# EAGLE board Routage_Schema (EAGLE 9.6.2)
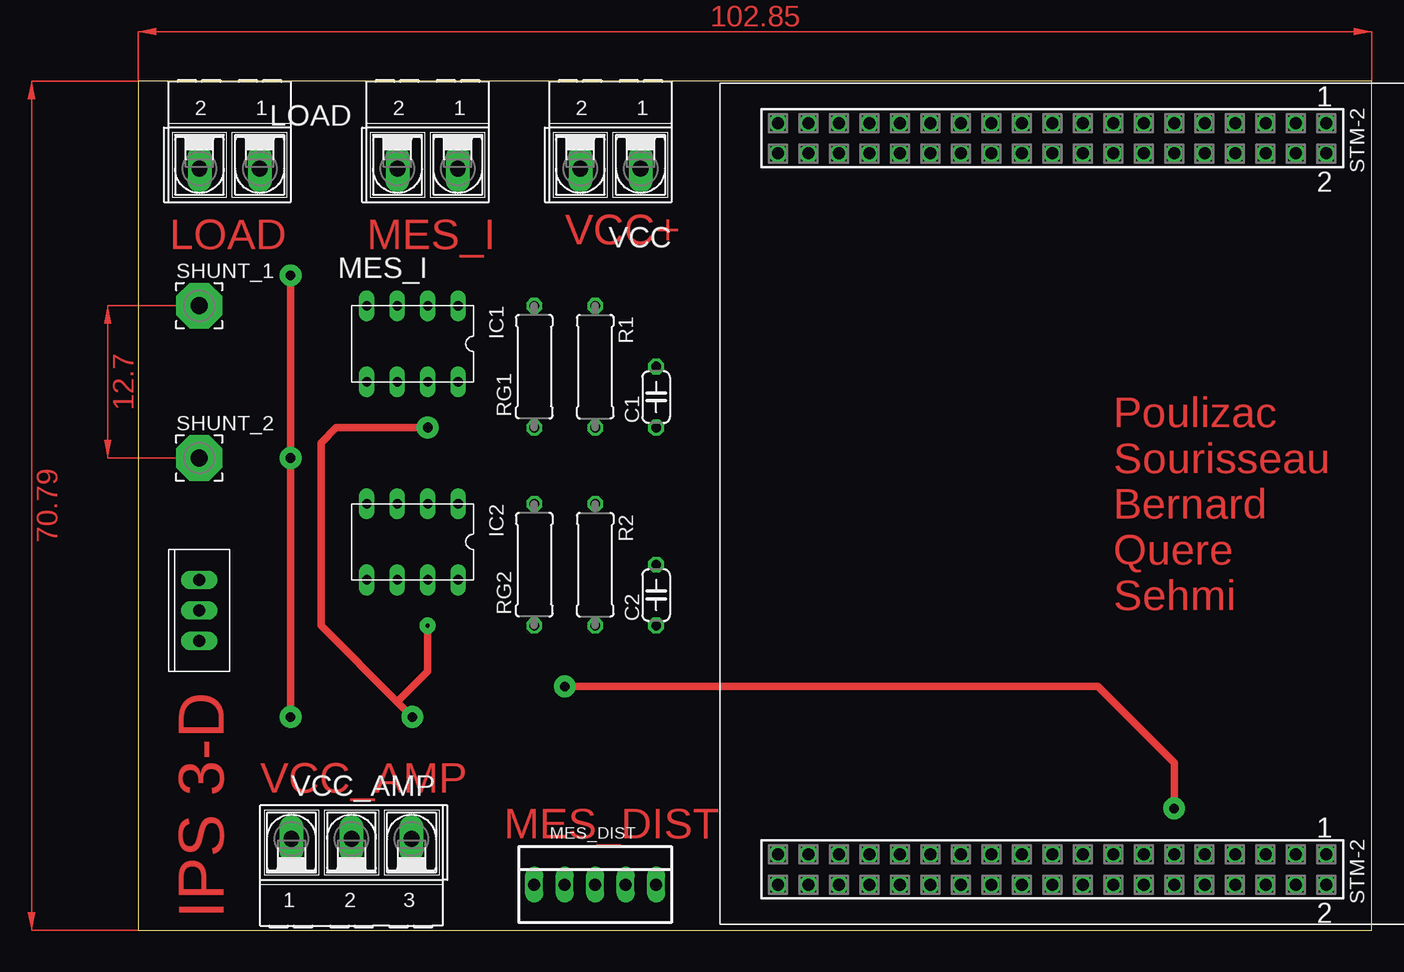
[diagram p0: board, top side]
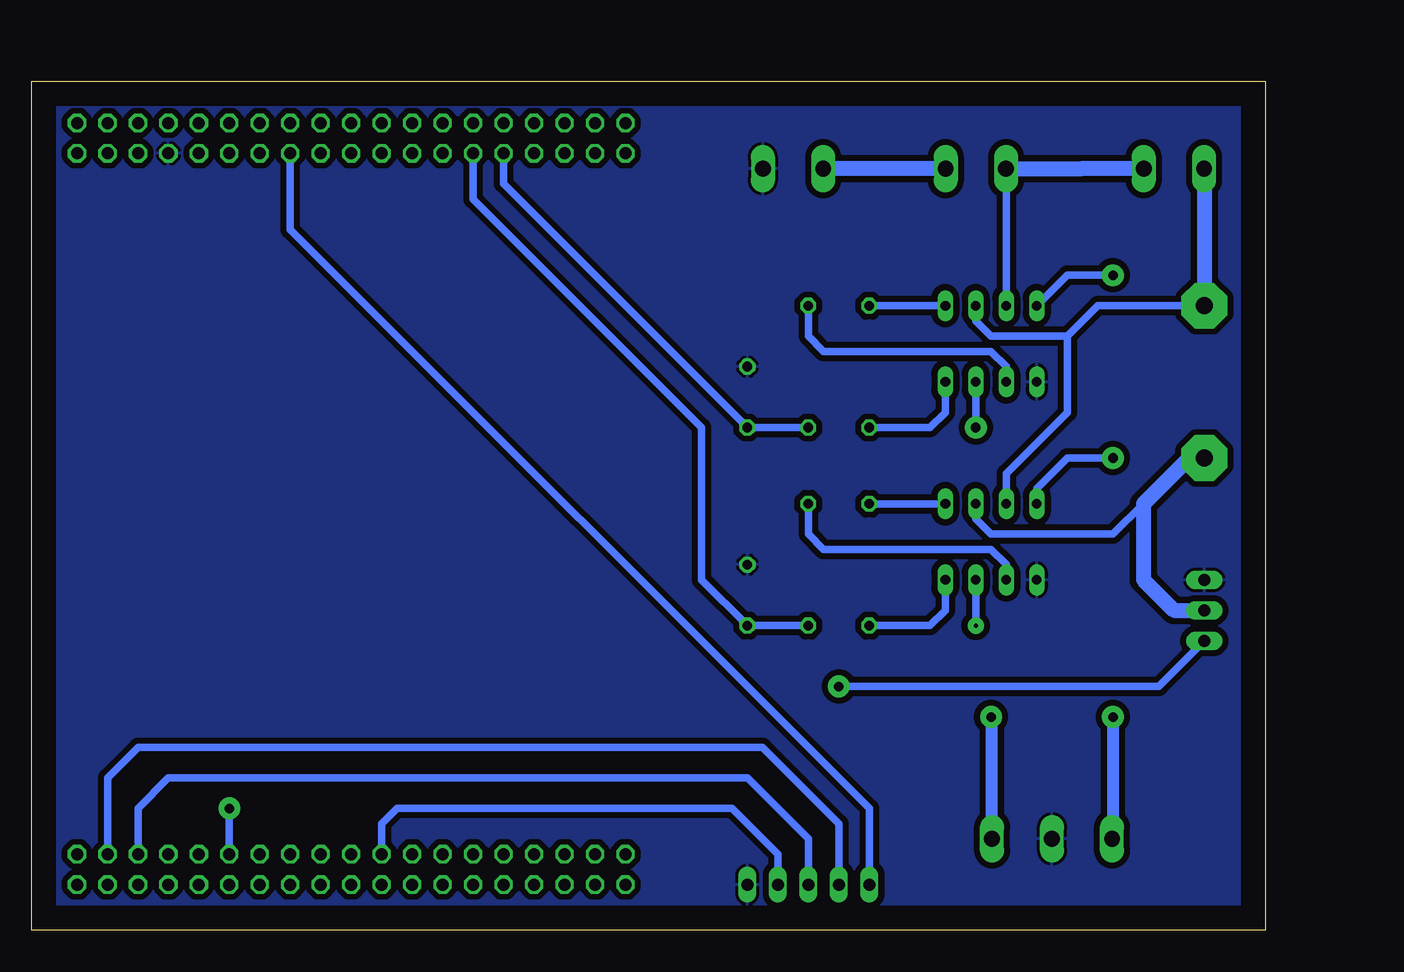
[diagram p1: board, bottom side, seen from below]

Size 102.85 x 70.79 mm. Coordinates in mm from the lower left corner, seen from the top.
Outline: 0,0 102.85,0 102.85,70.79 0,70.79 0,0
Copper layers (1*16): Top 0.035mm / dielectric 1.5mm / Bottom 0.035mm
Design rules "LBMS_ENIB": minimum track width 24mil, minimum drill 10mil, track to track 20mil, track to pad 20mil, pad to pad 20mil, via to via 20mil, smd to smd 8mil, copper to edge 80mil, drill to drill 8mil, minimum pad ring 10mil, minimum via ring 20mil, stop-mask expansion 4mil, vias tented up to drill 0mil, thermal gap 10mil

## Footprints (pad centres in the part's own frame; a part is rotated, then mirrored left to right if it is on the bottom)
C050-024X044 = drill 0.813 octagon: 1 -2.54,0; 2 2.54,0
DIL8 = drill 0.8 long: P1 -3.81,2.54; P2 -1.27,2.54; P3 1.27,2.54; P4 3.81,2.54; P5 3.81,8.89; P6 1.27,8.89; P7 -1.27,8.89; P8 -3.81,8.89
AK500/2-H = drill 1.321 long: 1 -2.515,0; 2 2.515,0
22-23-2051 = drill 1 long: 1 -5.08,0; 2 -2.54,0; 3 0,0; 4 2.54,0; 5 5.08,0
0309/10 = drill 0.813 octagon: 1 -5.08,0; 2 5.08,0
3,81/1,4 = drill 1.397 pad 3.81 octagon: 1 0,0
CONN_STM32_NUCLEO = drill 1 pad 1.5 octagon: 1 -1.27,22.86; 2 1.27,22.86; 3 -1.27,20.32; 4 1.27,20.32; 5 -1.27,17.78; 6 1.27,17.78; 7 -1.27,15.24; 8 1.27,15.24; 9 -1.27,12.7; 10 1.27,12.7; 11 -1.27,10.16; 12 1.27,10.16; 13 -1.27,7.62; 14 1.27,7.62; 15 -1.27,5.08; 16 1.27,5.08; 17 -1.27,2.54; 18 1.27,2.54; 19 -1.27,0; 20 1.27,0; 21 -1.27,-2.54; 22 1.27,-2.54; 23 -1.27,-5.08; 24 1.27,-5.08; 25 -1.27,-7.62; 26 1.27,-7.62; 27 -1.27,-10.16; 28 1.27,-10.16; 29 -1.27,-12.7; 30 1.27,-12.7; 31 -1.27,-15.24; 32 1.27,-15.24; 33 -1.27,-17.78; 34 1.27,-17.78; 35 -1.27,-20.32; 36 1.27,-20.32; 37 -1.27,-22.86; 38 1.27,-22.86; 39 59.69,22.86; 40 62.23,22.86; 41 59.69,20.32; 42 62.23,20.32; 43 59.69,17.78; 44 62.23,17.78; 45 59.69,15.24; 46 62.23,15.24; 47 59.69,12.7; 48 62.23,12.7; 49 59.69,10.16; 50 62.23,10.16; 51 59.69,7.62; 52 62.23,7.62; 53 59.69,5.08; 54 62.23,5.08; 55 59.69,2.54; 56 62.23,2.54; 57 59.69,0; 58 62.23,0; 59 59.69,-2.54; 60 62.23,-2.54; 61 59.69,-5.08; 62 62.23,-5.08; 63 59.69,-7.62; 64 62.23,-7.62; 65 59.69,-10.16; 66 62.23,-10.16; 67 59.69,-12.7; 68 62.23,-12.7; 69 59.69,-15.24; 70 62.23,-15.24; 71 59.69,-17.78; 72 62.23,-17.78; 73 59.69,-20.32; 74 62.23,-20.32; 75 59.69,-22.86; 76 62.23,-22.86
TO-220(2) = drill 1.016 long: GND 0,0; IN -2.54,0; OUT 2.54,0
AK500/3-H = drill 1.321 long: 1 -5.004,0; 2 0,0; 3 5.004,0

## Placement (x,y rotation side)
C1  [C050-024X044]  43.18,44.45 90 top
C2  [C050-024X044]  43.18,27.94 90 top
IC1  AD620  [DIL8]  22.86,54.61 180 top
IC2  AD620  [DIL8]  22.86,38.1 180 top
LOAD  [AK500/2-H]  7.62,63.5 180 top
MES_DIST  22-23-2051  [22-23-2051]  38.1,3.81 0 top
MES_I  [AK500/2-H]  24.13,63.5 180 top
R1  [0309/10]  38.1,46.99 270 top
R2  [0309/10]  38.1,30.48 270 top
RG1  [0309/10]  33.02,46.99 90 top
RG2  [0309/10]  33.02,30.48 90 top
SHUNT_1  [3,81/1,4]  5.08,52.07 0 top
SHUNT_2  [3,81/1,4]  5.08,39.37 0 top
STM-2  NUCLEO-F411RE  [CONN_STM32_NUCLEO]  76.2,66.04 270 top
U$1  IRLZ34N  [TO-220(2)]  5.08,26.67 90 top
VCC  [AK500/2-H]  39.37,63.5 180 top
VCC_AMP  [AK500/3-H]  17.78,7.62 0 top

## Library data of the parts
C1 C2 = rcl; SPICEPREFIX: C
IC1 IC2 = ad620
LOAD MES_I VCC VCC_AMP = con-ptr500; OC_FARNELL: unknown; OC_NEWARK: unknown
MES_DIST = con-molex; MF: MOLEX; MPN: 22-23-2051; OC_FARNELL: 1462952; OC_NEWARK: 38C9178
R1 R2 RG1 RG2 = rcl; SPICEPREFIX: R
SHUNT_1 SHUNT_2 = wirepad
STM-2 = prj-ips-jmb
U$1 = IRLZ34N; AVAILABILITY: In Stock; DESCRIPTION: N-Channel 55 V 30A (Tc) 3.8W (Ta), 68W (Tc) Surface Mount D2PAK; MF: Infineon Technologies; MP: IRLZ34N; PACKAGE: TO-220 Infineon; PRICE: None; PURCHASE-URL: https://pricing.snapeda.com/search/part/IRLZ34N/?ref=eda

## Nets
3.3: MES_DIST.1 STM-2.16
A: IC1.P3 LOAD.1 MES_I.2
GND: C1.2 C2.2 IC1.P5 IC2.P5 MES_DIST.5 STM-2.8 U$1.OUT VCC.1 VCC_AMP.2
N$1: IC2.P8 RG2.1
N$2: IC2.P1 RG2.2
N$3: IC1.P8 RG1.1
N$4: IC1.P1 RG1.2
PWM: STM-2.49 U$1.IN
RESET: MES_DIST.4 STM-2.59
SCL: MES_DIST.2 STM-2.41
SDA: MES_DIST.3 STM-2.43
V+: MES_I.1 VCC.2
V-_LOAD: IC1.P2 IC2.P3 LOAD.2 SHUNT_1.1
V-_SHUNT: IC2.P2 SHUNT_2.1 U$1.GND
V_OUT_1: C1.1 R1.2 STM-2.30
V_OUT_2: C2.1 R2.2 STM-2.28
VCC+_AMP: IC1.P7 IC2.P7 VCC_AMP.3
VCC-_AMP: IC1.P4 IC2.P4 VCC_AMP.1
VM_1: IC1.P6 R1.1
VM_2: IC2.P6 R2.1

## Tracks (layer width: path | path; a pad name or v marks a point on that pad's centre or on a via)
3.3
  Bottom 0.61: MES_DIST.1 33.02,10.16 81.28,58.42 STM-2.16
A
  Bottom 0.61: MES_I.2 21.59,63.48 IC1.P3
  Bottom 1.27: LOAD.1 15.24,63.5 MES_I.2
GND
  pour Bottom: 0,71.12 102.87,71.12 102.87,0 0,0
N$1
  Bottom 0.61: IC2.P8 26.67,26.67 27.94,25.4 RG2.1
N$2
  Bottom 0.61: IC2.P1 RG2.2
N$3
  Bottom 0.61: RG1.1 27.94,41.91 26.67,43.18 IC1.P8
N$4
  Bottom 0.61: RG1.2 IC1.P1
PWM  (via drill 0.8)
  Top 0.61: v35.56,20.32 80.01,20.32 86.36,13.97 v86.36,10.16
  Bottom 0.61: U$1.IN 8.89,20.32 v35.56,20.32 | v86.36,10.16 STM-2.49
RESET
  Bottom 0.61: MES_DIST.4 40.64,6.35 44.45,10.16 72.39,10.16 73.66,8.89 STM-2.59
SCL
  Bottom 0.61: MES_DIST.2 35.56,8.89 41.91,15.24 93.98,15.24 96.52,12.7 STM-2.41
SDA
  Bottom 0.61: MES_DIST.3 38.1,7.62 43.18,12.7 91.44,12.7 93.98,10.16 STM-2.43
V+
  Bottom 1.27: MES_I.1 VCC.2
V-_LOAD
  Bottom 0.61: LOAD.2 5.08,63.48 | SHUNT_1.1 13.97,52.07 16.51,49.53 | 16.51,49.53 22.86,49.53 24.13,50.8 IC1.P2 | 16.51,49.53 16.51,43.18 21.59,38.1 IC2.P3
  Bottom 1.27: 5.08,63.48 SHUNT_1.1
V-_SHUNT
  Bottom 0.61: IC2.P2 24.13,34.29 22.86,33.02 12.7,33.02 10.16,35.56
  Bottom 1.27: U$1.GND 7.62,26.67 10.16,29.21 10.16,35.56 6.35,39.37 SHUNT_2.1
V_OUT_1
  Bottom 0.61: R1.2 C1.1 63.5,62.23 STM-2.30
V_OUT_2
  Bottom 0.61: R2.2 C2.1 46.99,29.21 46.99,41.91 66.04,60.96 STM-2.28
VCC+_AMP  (via drill 0.35, 0.8)
  Top 0.61: v22.86,17.78 21.59,19.05 | 21.59,19.05 15.24,25.4 15.24,40.64 16.51,41.91 v24.13,41.91 | v24.13,25.4 24.13,21.59 21.59,19.05
  Bottom 0.61: 22.78,17.7 v22.86,17.78 | v24.13,41.91 IC1.P7 | IC2.P7 v24.13,25.4
  Bottom 1.016: VCC_AMP.3 22.78,17.7
VCC-_AMP  (via drill 0.8)
  Top 0.61: v12.7,17.78 v12.7,39.37 v12.7,54.61
  Bottom 0.61: v12.7,54.61 16.51,54.61 IC1.P4 | v12.7,39.37 16.51,39.37 19.05,36.83 IC2.P4
  Bottom 1.016: v12.7,17.78 12.7,7.7 VCC_AMP.1
VM_1
  Bottom 0.61: IC1.P6 21.59,46.99 22.86,48.26 36.83,48.26 38.1,49.53 R1.1
VM_2
  Bottom 0.61: IC2.P6 21.59,30.48 22.86,31.75 36.83,31.75 38.1,33.02 R2.1
(copper drawn outside any net)
  shapes: Top area x3

## Text on the board
Top: LOAD | MES_I | VCC+ | Poulizac / Sourisseau / Bernard / Quere / Sehmi | IPS 3-D | VCC_AMP | MES_DIST